# Altium PCB PCB_2025-10-29.pcbdoc
Units mil, origin at the board's own origin, x right, y up, seen from the top; angles counter-clockwise.
Board outline 3600 x 3400 mil, 2 copper layers (Top Layer, Bottom Layer); 45 components, 79 nets, 193 pads, 80 vias.
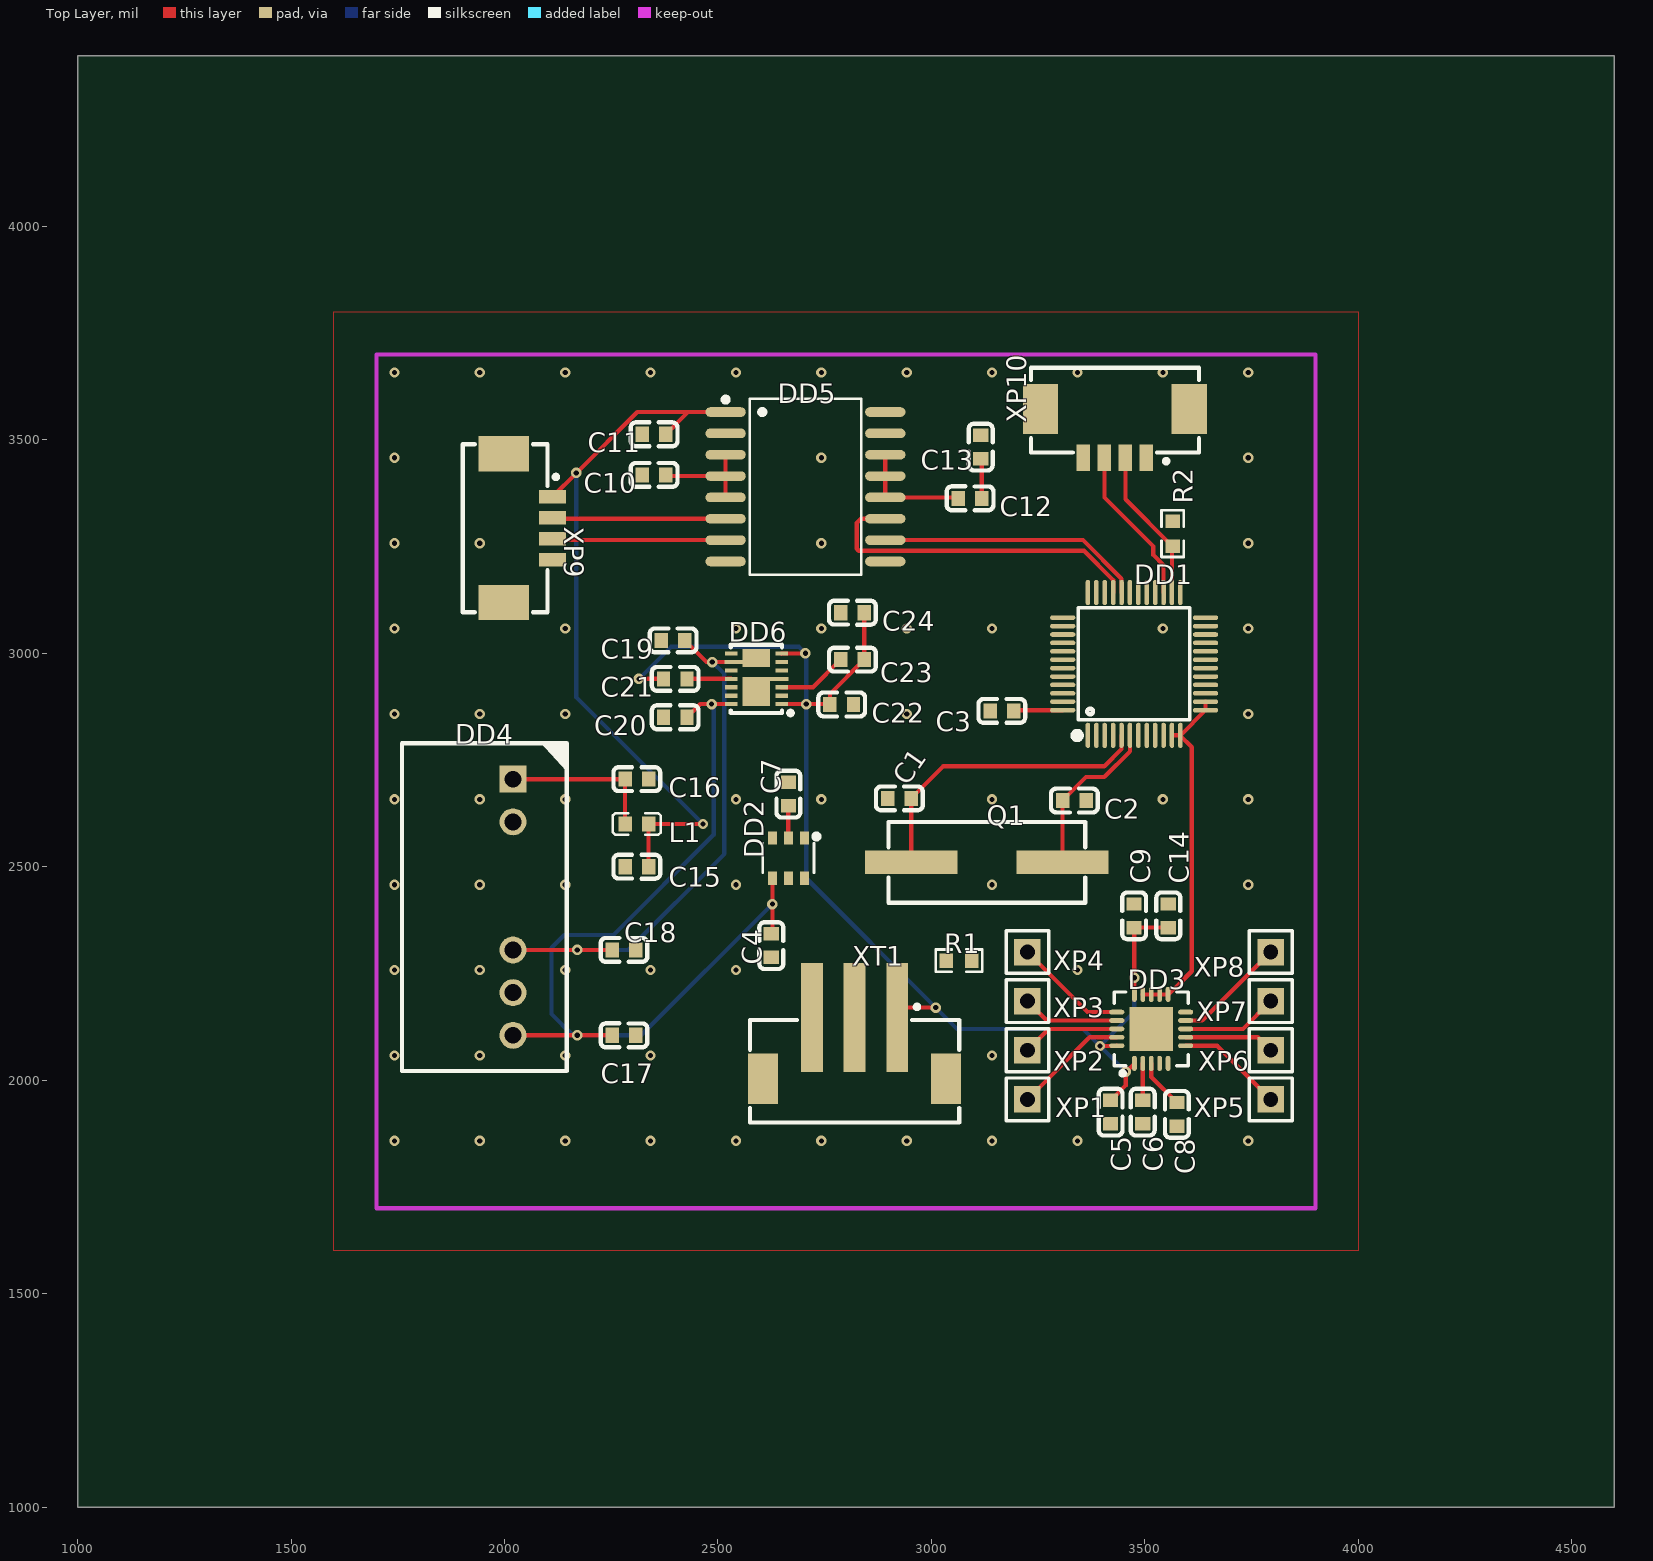
[diagram p0: Top Layer view]
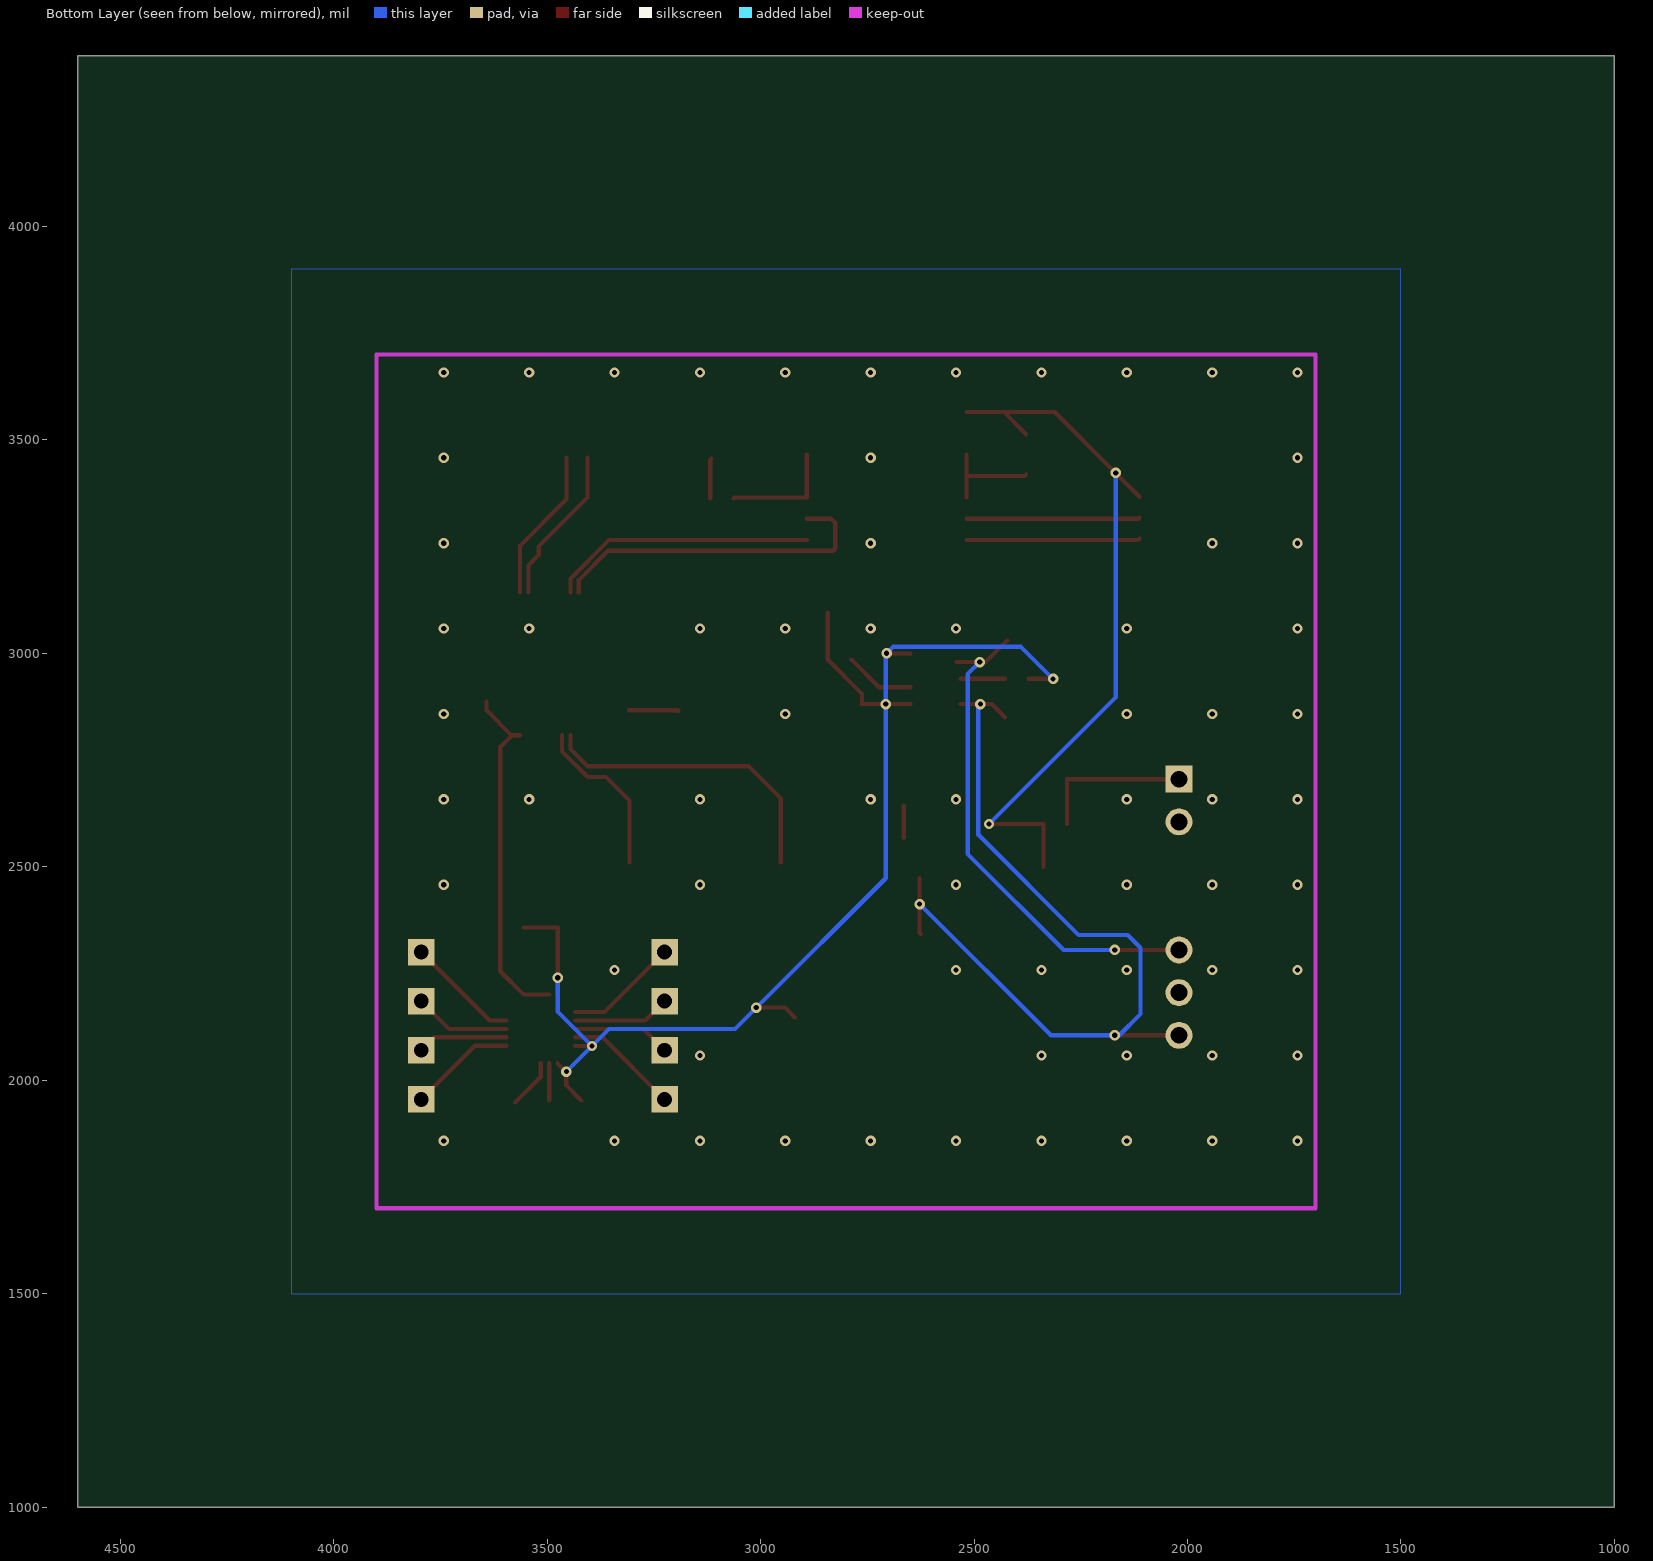
[diagram p1: Bottom Layer view, seen from below]

## Layer stack, top to bottom
Top Layer: signal copper (thickness not stored)
Dielectric: dielectric 12.6, FR-4, Dk 4.8
Bottom Layer: signal copper (thickness not stored)

## Board outline
4600,1000 1000,1000 1000,4400 4600,4400

## Components (designator, comment, footprint, x,y, rotation, side; value= is the part's Value field where it differs from the comment)
C1 "0.1u" C0603 2925,2660 r0 top
C2 "0.1u" C0603 3335,2655 r180 top
C3 "0.1u" C0603 3165,2865 r0 top
C4 "0.1u" C0603 2625,2315 r270 top
C5 "0.1u" C0603 3420,1925 r90 top
C6 "10u" C0603 3495,1925 r90 top
C7 "0.1u" C0603 2665,2670 r90 top
C8 "0.1u" C0603 3575,1920 r90 top
C9 "0.1u" C0603 3475,2385 r270 top
C10 "0.1u" C0603 2350.53,3417.91 r0 top
C11 "10u" C0603 2350.53,3512.91 r180 top
C12 "0.1u" C0603 3090.53,3362.91 r0 top
C13 "10u" C0603 3115.53,3482.91 r90 top
C14 "0.1u" C0603 3555,2385 r270 top
C15 "4.7u" C0603 2310,2500 r0 top
C16 "4.7u" C0603 2310,2705 r180 top
C17 "4.7u" C0603 2280,2105 r180 top
C18 "4.7u" C0603 2280,2305 r0 top
C19 "10u" C0603 2395,3030 r180 top
C20 "10u" C0603 2400,2850 r0 top
C21 "0.01u" C0603 2400,2940 r180 top
C22 "0.01u" C0603 2790,2880 r0 top
C23 "0.1u" C0603 2815,2985 r0 top
C24 "10u" C0603 2815,3095 r0 top
DD1 "STM32H503" LQFP-48_L7.0-W7.0-P0.50-LS9.0-BL 3475,2975 r0 top
DD2 "LT6654AHS6-3.3" TSOT-23-6_L2.9-W1.6-P0.95-LS2.8-BR 2665,2520 r90 top
DD3 "AD7949BCPZ" LFCSP-20_L4.0-W4.0-P0.50-BL-EP 3515,2120 r0 top
DD4 "G0509S-1WR2" PWRM-TH_7P-L19.5-W9.8-P2.54-PE3_4 2020,2405 r270 top
DD5 "ADUM4160BRWZ-RL" SOIC-16_L10.3-W7.5-P1.27-LS10.3-BL 2705,3390 r270 top
DD6 "LT3032EDE-5" DFN-14_L4.0-W3.0-P0.50-BL-EP_LT3032XXX 2590,2940 r90 top
L1 "1m" L0603 2310,2600 r180 top
Q1 "HC-49SMD-XTAL_MD" CRYSTAL-SMD_L11.4-W4.8-LS12.7 3130,2510 r0 top
R1 "0" R0603 3065,2280 r0 top
R2 "10k" R0603 3565,3280 r270 top
XP1 "IN0" HDR-M-2.54_1X1 3225,1955 r0 top
XP2 "IN1" HDR-M-2.54_1X1 3225,2070 r0 top
XP3 "IN2" HDR-M-2.54_1X1 3225,2185 r0 top
XP4 "IN3" HDR-M-2.54_1X1 3225,2300 r0 top
XP5 "IN4" HDR-M-2.54_1X1 3795,1955 r0 top
XP6 "IN5" HDR-M-2.54_1X1 3795,2070 r0 top
XP7 "IN6" HDR-M-2.54_1X1 3795,2185 r0 top
XP8 "IN7" HDR-M-2.54_1X1 3795,2300 r0 top
XP9 "HX 1.25-4PIN WSTP-A" CONN-SMD_4P-P1.25_HX-1.25-4PIN-WSTP 2055.53,3292.91 r270 top
XP10 "HX 1.25-4PIN WSTP-A1" CONN-SMD_4P-P1.25_HX-1.25-4PIN-WSTP 3430,3515 r180 top
XT1 "HX 2.54-3PIN LTJS" CONN-SMD_3P-P2.54_HX-2.54-3PIN-LTJS 2820,2075 r0 top

## Footprints (in the part's own frame and the unit in brackets; to place one, negate y for a bottom-side part, rotate by r counter-clockwise, add the part's x,y. Pads: shape width x height; smd on the part's side, far side on the other; paste and mask are expansions set on the pad)
C0603 [mm]
  rect 0.8x0.9 smd paste+0 mask+0.051: 1(-0.7,0) 2(0.7,0)
  silkscreen extent -1.39,-0.71 1.39,0.71
CONN-SMD_3P-P2.54_HX-2.54-3PIN-LTJS [mm]
  rect 1.3x6.5 smd paste+0 mask+0.05: 1(2.54,1.825) 2(0,1.825) 3(-2.54,1.825)
  rect 1.8x3 smd paste+0 mask+0.05: 4(-5.44,-1.825) 5(5.44,-1.825)
  silkscreen extent -6.22,-4.42 6.22,2.58
CONN-SMD_4P-P1.25_HX-1.25-4PIN-WSTP [mm]
  rect 0.8x1.6 smd paste+0 mask+0.051: 1(-1.875,1.45) 2(-0.625,1.45) 3(0.625,1.45) 4(1.875,1.45)
  rect 2.1x3 smd paste+0 mask+0.051: 5(4.425,-1.45) 6(-4.425,-1.45)
  silkscreen extent -5,-3.9 5,1.78
CRYSTAL-SMD_L11.4-W4.8-LS12.7 [mm]
  rect 5.5x1.4 smd paste+0 mask+0.051: 1(-4.5,0) 2(4.5,0)
  silkscreen extent -5.85,-2.4 5.85,2.4
DFN-14_L4.0-W3.0-P0.50-BL-EP_LT3032XXX [mm]
  rect 0.25x0.75 smd paste-100 mask+0.05: 1(-1.5,-1.5) 2(-1,-1.5) 3(-0.5,-1.5) 5(0.5,-1.5) 6(1,-1.5) 7(1.5,-1.5) 8(1.5,1.5) 10(0.5,1.5) 11(0,1.5) 12(-0.5,1.5) 13(-1,1.5) 14(-1.5,1.5)
  rect 0.25x1.3 smd paste-100 mask+0.05: 4(0,-1.25) 9(1,1.25)
  rect 1.75x1.65 smd paste-100 mask+0.05: 15(-0.75,0)
  rect 1.07x1.65 smd paste-100 mask+0.05: 16(1.25,0)
  silkscreen extent -2.16,-2.16 2.03,1.52
HDR-M-2.54_1X1 [mil]
  rect 62x62 hole 35 paste+0 mask+2: 1(0,0)
  silkscreen extent -50,-50 50,50
L0603 [mm]
  rect 0.8x0.864 smd paste-100 mask+0.051: 1(-0.7,0) 2(0.7,0)
  silkscreen extent -1.42,-0.65 1.42,0.65
LFCSP-20_L4.0-W4.0-P0.50-BL-EP [mm]
  oval 0.28x0.9 smd paste-100 mask+0.051: 1(-1,-2.05) 2(-0.5,-2.05) 3(0,-2.05) 4(0.5,-2.05) 5(1,-2.05) 11(1,2.05) 12(0.5,2.05) 13(0,2.05) 14(-0.5,2.05) 15(-1,2.05)
  oval 0.9x0.28 smd paste-100 mask+0.051: 6(2.05,-1) 7(2.05,-0.5) 8(2.05,0) 9(2.05,0.5) 10(2.05,1) 16(-2.05,1) 17(-2.05,0.5) 18(-2.05,0) 19(-2.05,-0.5) 20(-2.05,-1)
  rect 2.6x2.6 smd paste-100 mask+0.051: 21(0,0)
  silkscreen extent -2.2,-2.77 2.2,2.2
LQFP-48_L7.0-W7.0-P0.50-LS9.0-BL [mm]
  oval 0.27x1.5 smd paste+0 mask+0.05: 1(-2.75,-4.25) 2(-2.25,-4.25) 3(-1.75,-4.25) 4(-1.25,-4.25) 5(-0.75,-4.25) 6(-0.25,-4.25) 7(0.25,-4.25) 8(0.75,-4.25) 9(1.25,-4.25) 10(1.75,-4.25) 11(2.25,-4.25) 12(2.75,-4.25) 25(2.75,4.25) 26(2.25,4.25) 27(1.75,4.25) 28(1.25,4.25) 29(0.75,4.25) 30(0.25,4.25) 31(-0.25,4.25) 32(-0.75,4.25) 33(-1.25,4.25) 34(-1.75,4.25) 35(-2.25,4.25) 36(-2.75,4.25)
  oval 1.5x0.27 smd paste+0 mask+0.05: 13(4.25,-2.75) 14(4.25,-2.25) 15(4.25,-1.75) 16(4.25,-1.25) 17(4.25,-0.75) 18(4.25,-0.25) 19(4.25,0.25) 20(4.25,0.75) 21(4.25,1.25) 22(4.25,1.75) 23(4.25,2.25) 24(4.25,2.75) 37(-4.25,2.75) 38(-4.25,2.25) 39(-4.25,1.75) 40(-4.25,1.25) 41(-4.25,0.75) 42(-4.25,0.25) 43(-4.25,-0.25) 44(-4.25,-0.75) 45(-4.25,-1.25) 46(-4.25,-1.75) 47(-4.25,-2.25) 48(-4.25,-2.75)
  silkscreen extent -3.59,-4.46 3.3,3.34
PWRM-TH_7P-L19.5-W9.8-P2.54-PE3_4 [mm]
  rect 1.6x1.6 hole 1 paste+0 mask+0.051: 1(-7.62,0)
  round 1.6 hole 1 paste+0 mask+0.051: 2(-5.08,0) 5(2.54,0) 6(5.08,0) 7(7.62,0)
  silkscreen extent -9.78,-6.6 9.75,3.2
R0603 [mil]
  rect 31.75x34.02 smd paste-3937.01 mask+2: 1(-29.66,0) 2(29.66,0)
  silkscreen extent -55,-26 55,26
SOIC-16_L10.3-W7.5-P1.27-LS10.3-BL [mil]
  oval 22.6x94.51 smd paste+0 mask+2: 1(-175,-187.02) 2(-125,-187.02) 3(-75,-187.02) 4(-25,-187.02) 5(25,-187.02) 6(75,-187.02) 7(125,-187.02) 8(175,-187.02) 9(175,187.02) 10(125,187.02) 11(75,187.02) 12(25,187.02) 13(-25,187.02) 14(-75,187.02) 15(-125,187.02) 16(-175,187.02)
  silkscreen extent -210,-193 206,131
TSOT-23-6_L2.9-W1.6-P0.95-LS2.8-BR [mm]
  rect 0.8x0.532 smd paste+0 mask+0.051: 1(1.2,-0.95) 2(1.2,0) 3(1.2,0.95) 4(-1.2,0.95) 5(-1.2,0) 6(-1.2,-0.95)
  silkscreen extent -0.88,-1.82 1.44,1.53

## Via types
v1: diameter 24.02, hole 12.01, Top Layer to Bottom Layer, tented both sides, 66 vias
v2: diameter 24.41, hole 12.2, Top Layer to Bottom Layer, tented both sides, 14 vias

## Nets (pads, with @x,y where several pads share a name; then routed paths per layer and width w, separated by ;. In a path a pad name is that pad's centre, name@x,y a point inside that pad or via, vN(x,y) a via of type N, cw(c..) or ccw(c..) an arc to the next point about the centre after c; other vN are vias at no path point)
+3,3V: C3.2 DD1.48 | length 115.8
  Top Layer w10: C3.2 3194.29,2866.73 DD1.48
+5V: C5.2 C9.2 C14.2 C21.2 C22.1 C23.2 C24.2 DD3.1 DD3.15 DD3.20 DD6.1 DD6.7 XT1.1 | length 3045.6
  Top Layer w10: v2(2315,2940) C21.2 ; DD6.1@2649.05,2880.95 v2(2706.9,2880.95) 2761.49,2880.95 C22.1 2762.44,2904.88 C23.2 C24.2 ; DD6.7@2649.1,2999.1 v2(2705,3000) ; XT1.1 2943.15,2170 v2(3010,2170) ; v2(3395,2080) 3433.66,2080 DD3.20 ; C5.2 3455,1987.56 v2(3455,2020) 3456.34,2020 DD3.1 ; DD3.15 v2(3475,2240) C9.2 C14.2
  Bottom Layer w10: v2(2315,2940) 2390,3015 2690,3015 v2(2705,3000) 2706.9,2998.1 v2(2706.9,2880.95) ; v2(2706.9,2880.95) 2706.9,2473.1 v2(3010,2170) 3060,2120 3355,2120 v2(3395,2080) ; v2(3455,2020) v2(3395,2080) ; v2(3475,2240) 3475,2160 v2(3395,2080)
+5V_USB: C11.1 C15.2 DD5.1 L1.1 XP9.1 | length 1821.7
  Top Layer w10: XP9.1 v2(2168.34,3422.46) 2310.88,3565 DD5.1 2430.18,3565 C11.1 ; C15.2 L1.1 v2(2465,2600)
  Bottom Layer w10: v2(2168.34,3422.46) 2168.34,2896.66 v2(2465,2600)
+7V: C4.1 C17.2 C20.2 DD2.4 DD4.7 DD6.14 | length 2098.3
  Top Layer w10: DD4.7 v2(2170.5,2105) C17.2 ; C20.2 2458.51,2880.95 v2(2485.16,2880.95) DD6.14 ; C4.1 2627.6,2345.16 v2(2627.6,2412.44) DD2.4
  Bottom Layer w10: v2(2485.16,2880.95) 2490,2876.11 2490,2575 2255,2340 2140,2340 2110,2310 2110,2155 2160,2105 v2(2170.5,2105) 2320.16,2105 v2(2627.6,2412.44)
-5V: XT1.2
-7V: C18.1 C19.1 DD4.5 DD6.9 | length 1270.4
  Top Layer w10: DD4.5 v2(2170.5,2305) C18.1 ; C19.1 2473.2,2979.36 v2(2486.66,2979.36) DD6.9
  Bottom Layer w10: v2(2170.5,2305) 2290,2305 2515,2530 2515,2951 v2(2486.66,2979.36)
DD1_1: DD1.1
DD1_2: DD1.2
DD1_3: DD1.3
DD1_4: DD1.4
DD1_5: C1.2 DD1.5 Q1.1 | length 722.9
  Top Layer w10: Q1.1 C1.2 3027.6,2735 3405,2735 3445.5,2775.5 DD1.5
DD1_6: C2.2 DD1.6 Q1.2 | length 387.9
  Top Layer w10: Q1.2 C2.2 ; C2.2 3362.44,2710 3405,2710 3465.16,2770.16 DD1.6
DD1_7: DD1.7
DD1_8: DD1.8
DD1_9: DD1.9
DD1_10: DD1.10
DD1_11: DD1.11 DD1.12 DD1.13 DD1.14 DD3.11 DD3.12 DD3.13 DD3.14 | length 823.3
  Top Layer w10: DD3.14 3555.7,2200.7 3610,2255 3610,2780 3582.3,2807.7 DD1.11 ; DD1.12 DD1.13 DD1.14
DD1_15: DD1.15
DD1_16: DD1.16
DD1_17: DD1.17
DD1_18: DD1.18
DD1_19: DD1.19
DD1_20: DD1.20
DD1_21: DD1.21
DD1_22: DD1.22
DD1_23: DD1.23
DD1_24: DD1.24
DD1_25: DD1.25
DD1_26: DD1.26 R2.2 XP10.2 | length 361.9
  Top Layer w10: XP10.2 3454.61,3360.73 R2.2 3563.58,3248.92 DD1.26
DD1_27: DD1.27 XP10.3 | length 373
  Top Layer w10: XP10.3 3405.4,3364.6 3520,3250 3520,3230 3543.9,3206.1 DD1.27
DD1_28: DD1.28
DD1_29: DD1.29
DD1_30: DD1.30
DD1_31: DD1.31
DD1_32: DD1.32 DD5.10 | length 623.1
  Top Layer w10: DD5.10 3355,3265 3445.47,3174.53 DD1.32
DD1_33: DD1.33 DD5.11 | length 791.6
  Top Layer w10: DD5.11 2835,3315 2825,3305 2825,3245 2830,3240 3357.3,3240 3425.8,3171.5 DD1.33
DD1_34: DD1.34
DD1_35: DD1.35
DD1_36: DD1.36
DD1_37: DD1.37
DD1_38: DD1.38
DD1_39: DD1.39
DD1_40: DD1.40
DD1_41: DD1.41
DD1_42: DD1.42
DD1_43: DD1.43
DD1_44: DD1.44
DD1_45: DD1.45
DD1_46: DD1.46
DD1_47: DD1.47
DD2_3: DD2.3
DD2_5: DD2.5
DD3_2: C6.2 DD3.2 | length 86.9
  Top Layer w10: C6.2 3495,2039 DD3.2
DD3_3: C8.2 DD3.3 | length 116.6
  Top Layer w10: DD3.3 3515,2007.56 C8.2
DD3_6: DD3.6 XP5.1 | length 251.3
  Top Layer w10: DD3.6 3669.37,2080.63 XP5.1
DD3_7: DD3.7 XP6.1 | length 211.8
  Top Layer w10: DD3.7 3764.68,2100.32 XP6.1
DD3_8: DD3.8 XP7.1 | length 226.2
  Top Layer w10: DD3.8 3730,2120 XP7.1
DD3_9: DD3.9 XP8.1 | length 265.7
  Top Layer w10: DD3.9 3634.69,2139.69 XP8.1
DD3_10: DD3.10
DD3_16: DD3.16 XP4.1 | length 267.5
  Top Layer w10: XP4.1 3365.63,2159.37 DD3.16
DD3_17: DD3.17 XP3.1 | length 228.1
  Top Layer w10: XP3.1 3270.31,2139.69 DD3.17
DD3_18: DD3.18 XP2.1 | length 230
  Top Layer w10: XP2.1 3275,2120 DD3.18
DD3_19: DD3.19 XP1.1 | length 269.5
  Top Layer w10: XP1.1 3370.32,2100.32 DD3.19
DD4_1: C16.2 DD4.1 L1.2 | length 367.4
  Top Layer w10: DD4.1 C16.2 L1.2
DD5_3: C10.2 DD5.3 DD5.4 DD5.5 | length 241.1
  Top Layer w10: C10.2 2381.01,3415 DD5.4 ; DD5.5 DD5.4 ; DD5.3 DD5.4
DD5_6: DD5.6 XP9.2 | length 406.4
  Top Layer w10: XP9.2 2115.14,3315 DD5.6
DD5_7: DD5.7 XP9.3 | length 406.7
  Top Layer w10: XP9.3 2115.93,3265 DD5.7
DD5_12: C12.1 DD5.12 DD5.13 DD5.14 | length 271.8
  Top Layer w10: DD5.14 DD5.12 3060.89,3365 C12.1
DD6_2: DD6.2
DD6_3: C23.1 DD6.3 | length 165.2
  Top Layer w10: DD6.3@2649.05,2920.32 2722.75,2920.32 C23.1
DD6_6: DD6.6
DD6_8: DD6.8
DD6_10: DD6.10
DD6_11: C21.1 DD6.11 | length 103.4
  Top Layer w10: C21.1 2486.28,2940 DD6.11
DD6_12: DD6.12
DD6_13: DD6.13
DD6_16: DD6.16
GND: C1.1 C2.1 C3.1 C4.2 C5.1 C6.1 C7.1 C7.2 C8.1 C9.1 C10.1 C11.2 C12.2 C13.1 C13.2 C14.1 C15.1 C16.1 C17.1 C18.2 C19.2 C20.1 C22.2 C24.1 DD2.1 DD2.2 DD2.6 DD3.4 DD3.5 DD4.2 DD4.6 DD5.2 DD5.8 DD5.9 DD5.15 DD5.16 DD6.4 DD6.5 DD6.15 R1.1 R1.2 R2.1 XP9.4 XP10.1 XP10.4 XT1.3 | length 168.7
  Top Layer w10: DD2.2 C7.1 ; C13.1 3118.09,3452.8 C12.2
  other v1: 1742.21,1857.8 1942.21,1857.8 2142.21,1857.8 2342.21,1857.8 2542.2,1857.8 2742.2,1857.8 2942.2,1857.8 3142.2,1857.8 3342.2,1857.8 3742.2,1857.8 1742.21,2057.8 1942.21,2057.8 2142.21,2057.8 2342.21,2057.8 3142.2,2057.8 1742.21,2257.8 1942.21,2257.8 2142.21,2257.8 2342.21,2257.8 2542.2,2257.8 3342.2,2257.8 1742.21,2457.8 1942.21,2457.8 2142.21,2457.8 2542.2,2457.8 3142.2,2457.8 3742.2,2457.8 1742.21,2657.8 1942.21,2657.8 2142.21,2657.8 2542.2,2657.8 2742.2,2657.8 3142.2,2657.8 3542.2,2657.8 3742.2,2657.8 1742.21,2857.8 1942.21,2857.8 2142.21,2857.8 2942.2,2857.8 3742.2,2857.8 1742.21,3057.79 2142.21,3057.79 2542.2,3057.79 2742.2,3057.79 2942.2,3057.79 3142.2,3057.79 3542.2,3057.79 3742.2,3057.79 1742.21,3257.79 1942.21,3257.79 2742.2,3257.79 3742.2,3257.79 1742.21,3457.79 2742.2,3457.79 3742.2,3457.79 1742.21,3657.79 1942.21,3657.79 2142.21,3657.79 2342.21,3657.79 2542.2,3657.79 2742.2,3657.79 2942.2,3657.79 3142.2,3657.79 3342.2,3657.79 3542.2,3657.79 3742.2,3657.79
S$7179: 
pads on no net: DD3.21 XP9.5 XP9.6 XP10.5 XP10.6 XT1.4 XT1.5

## Polygon pours and split planes (outlines as drawn)
GND on Bottom Layer (solid): 1500,3900 4100,3900 4100,1500 1500,1500 1500,3900
GND on Top Layer (solid): 1600,3800 4000,3800 4000,1600 1600,1600 1600,3800